# Altium PCB Voltage detect V3.PcbDoc
Units mm, origin at the board's own origin, x right, y up, seen from the top; angles counter-clockwise.
Board outline 97.7 x 87.5 mm, 2 copper layers (Top Layer, Bottom Layer); 87 components, 64 nets, 234 pads, 31 vias.
Unrouted connection lines stored in the file: 5.
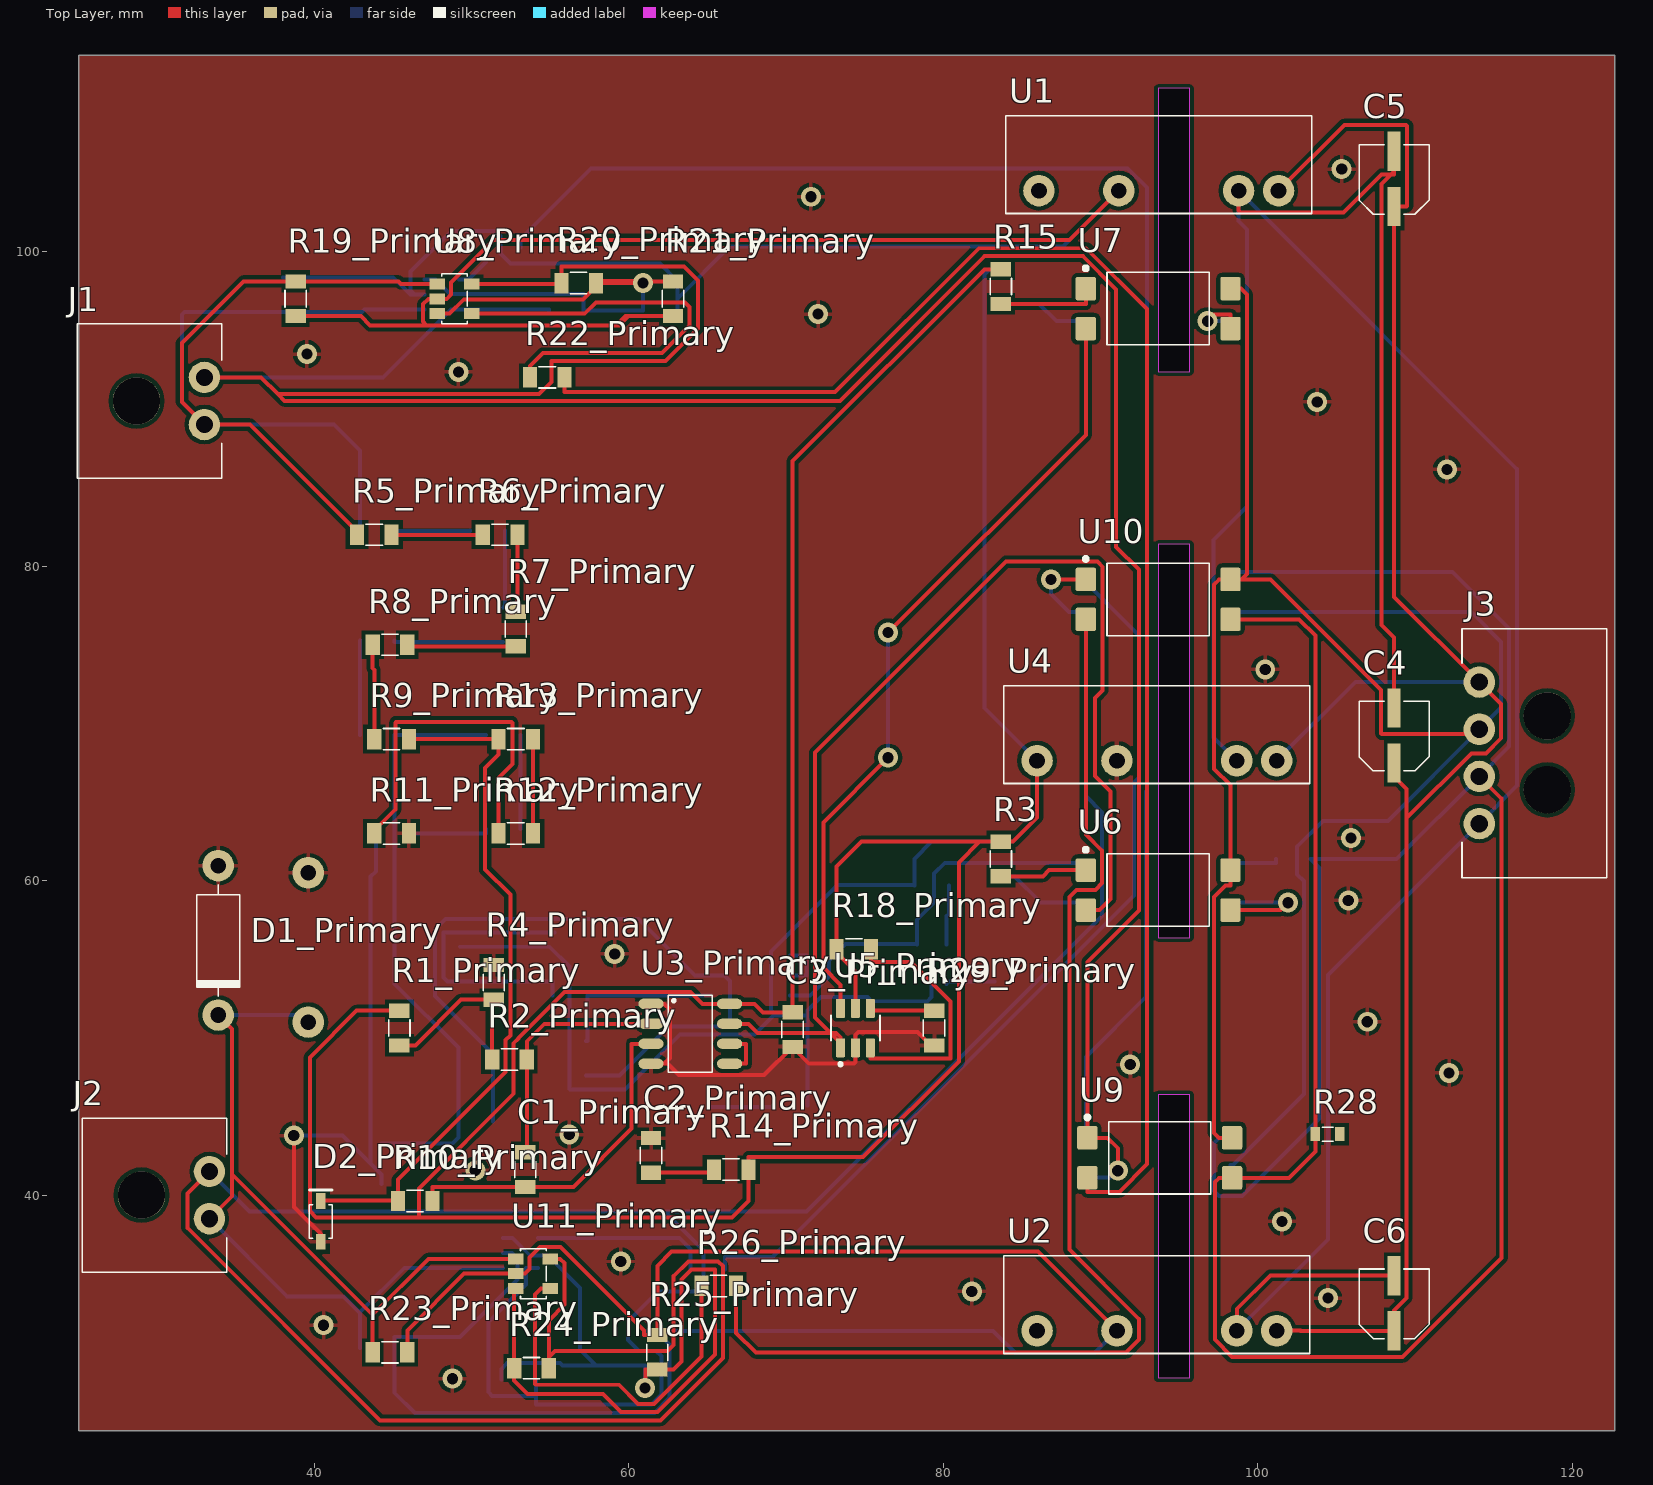
[diagram p0: Top Layer view]
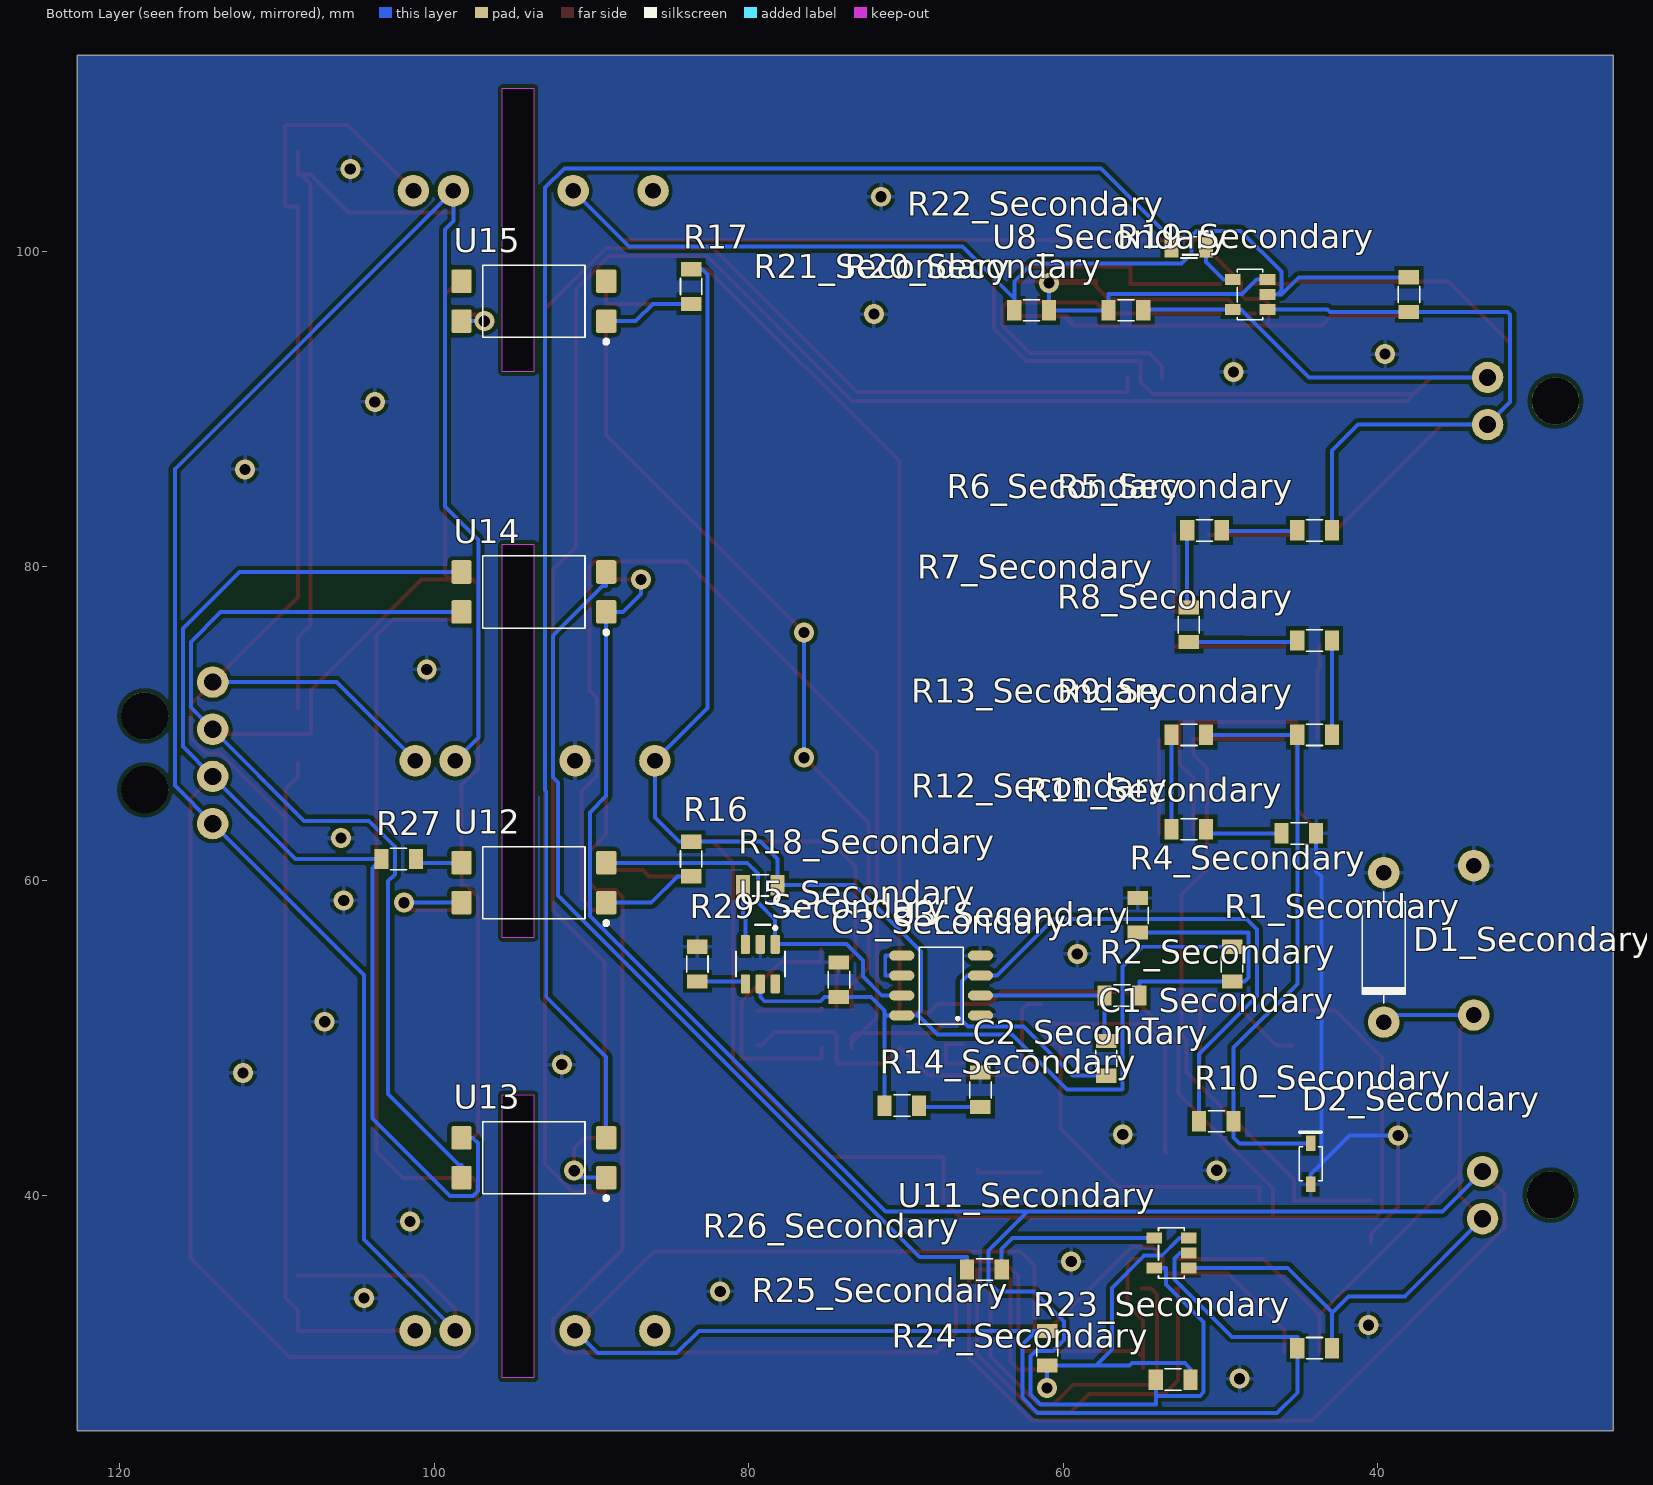
[diagram p1: Bottom Layer view, seen from below]

## Layer stack, top to bottom
Top Solder: solder mask 0.0102, Solder Resist, Dk 3.5
Top Layer: signal copper 0.0356
Dielectric 1: dielectric 0.32, FR-4, Dk 4.8
Bottom Layer: signal copper 0.0356
Bottom Solder: solder mask 0.0102, Solder Resist, Dk 3.5

## Board outline
25,25 25,112.5 122.7,112.5 122.7,25
cut-out: 93.65,28.375 95.65,28.375 95.65,46.375 93.65,46.375
cut-out: 93.65,56.375 95.65,56.375 95.65,81.375 93.65,81.375
cut-out: 93.65,92.375 95.65,92.375 95.65,110.375 93.65,110.375

## Design rules (kind name [scope] priority, off if disabled: settings)
Clearance [All] p1: gap=0.254 ignorepadtopadclearanceinfootprint=FALSE except(0: Arc-Hole Track-Hole SMDPad-Hole THPad-Hole Via-Hole Fill-Hole Poly-Hole Region-Hole Text-Hole)
PolygonConnect [All] p1: connectstyle=Relief reliefconductorwidth=0.254 reliefentries=4 polygonreliefangle="90 Angle" airgapwidth=0.254
RoomDefinition Secondary [InComponentClass('Secondary')] p1: confinementstyle=ConfineIn formatcopy=TRUE lockcomponents=FALSE outline 28,24 103,24 103,115 28,115
RoomDefinition Primary [InComponentClass('Primary')] p2: confinementstyle=ConfineIn formatcopy=TRUE lockcomponents=FALSE outline 28.8,24 103.8,24 103.8,115 28.8,115
RoomDefinition Sheet1 [InComponentClass('Sheet1')] p3: confinementstyle=ConfineIn formatcopy=TRUE lockcomponents=FALSE outline 28.067,0 174.244,0 174.244,20 28.067,20
RoutingVias [All] p1: holewidth=0.711 width=1.27 viastyle="Through Hole" minholewidth=0.711 minwidth=1.27 maxholewidth=0.711 maxwidth=1.27
SolderMaskExpansion [All] p1: expansion=0.102 istentingtop=FALSE
Width [All] p1: maxlimit=0.254 minlimit=0.254 preferedwidth=0.254
30 further rules are at their usual default settings.

## Classes and differential pairs
channel class "Voltage detectV2": Primary Secondary
component class Sheet1: C4 C5 C6 J1 J2 J3 R3 R15 R16 R17 R27 R28 U1 U2 U4 U6 U7 U9 U10 U12 U13 U14 U15
component class Secondary: C1_Secondary C2_Secondary C3_Secondary D1_Secondary D2_Secondary R1_Secondary R2_Secondary R4_Secondary R5_Secondary R6_Secondary R7_Secondary R8_Secondary R9_Secondary R10_Secondary R11_Secondary R12_Secondary R13_Secondary R14_Secondary R18_Secondary R19_Secondary R20_Secondary R21_Secondary R22_Secondary R23_Secondary R24_Secondary R25_Secondary R26_Secondary R29_Secondary U3_Secondary U5_Secondary U8_Secondary U11_Secondary
component class Primary: C1_Primary C2_Primary C3_Primary D1_Primary D2_Primary R1_Primary R2_Primary R4_Primary R5_Primary R6_Primary R7_Primary R8_Primary R9_Primary R10_Primary R11_Primary R12_Primary R13_Primary R14_Primary R18_Primary R19_Primary R20_Primary R21_Primary R22_Primary R23_Primary R24_Primary R25_Primary R26_Primary R29_Primary U3_Primary U5_Primary U8_Primary U11_Primary

## Components (designator, comment, footprint, x,y, rotation, side; value= is the part's Value field where it differs from the comment)
C1_Primary "10nF" "0805 Capicator" 53.4,41.625 r90 top (schematic designator C1)
C1_Secondary "10nF" "0805 Capicator" 57.25,48.694 r90 bottom (schematic designator C1)
C2_Primary "0.1uF" "0805 Capicator" 61.4,42.525 r90 top (schematic designator C2)
C2_Secondary "0.1uF" "0805 Capicator" 65.25,46.694 r90 bottom (schematic designator C2)
C3_Primary "0.1uF" "0805 Capicator" 70.4,50.525 r270 top (schematic designator C3)
C3_Secondary "0.1uF" "0805 Capicator" 74.25,53.694 r90 bottom (schematic designator C3)
C4 "4.7uF" "Bar Cap 4x5.4" 108.65,70.977 r0 top
C5 "4.7uF" "Bar Cap 4x5.4" 108.65,106.375 r0 top
C6 "4.7uF" "Bar Cap 4x5.4" 108.65,34.875 r0 top
D1_Primary "Diode" DO-41 33.875,60.95 r270 top (schematic designator D1)
D1_Secondary "Diode" DO-41 39.6,60.5 r270 bottom (schematic designator D1)
D2_Primary "Zener 12V" sod-323 40.4,37.025 r90 top (schematic designator D2)
D2_Secondary "Zener 12V" sod-323 44.25,40.694 r90 bottom (schematic designator D2)
J1 "Conn2x1" "MolexMicroFit 2x1" 33,92 r270 top
J2 "Conn2x1" "MolexMicroFit 2x1" 33.32,41.5 r270 top
J3 "Conn4x1" "MolexMicroFit 4x1" 114.075,72.625 r90 top
R1_Primary "75k" "0805 Resistor" 45.4,50.625 r270 top (schematic designator R1)
R1_Secondary "75k" "0805 Resistor" 49.25,54.694 r270 bottom (schematic designator R1)
R2_Primary "100R" "0805 Resistor" 52.4,48.625 r0 top (schematic designator R2)
R2_Secondary "100R" "0805 Resistor" 56.25,52.694 r0 bottom (schematic designator R2)
R3 "100R" "0805 Resistor" 83.65,61.375 r90 top
R4_Primary "200k" "0805 Resistor" 51.4,53.525 r270 top (schematic designator R4)
R4_Secondary "200k" "0805 Resistor" 55.25,57.794 r270 bottom (schematic designator R4)
R5_Primary "200k" "0805 Resistor" 43.8,82 r0 top (schematic designator R5)
R5_Secondary "200k" "0805 Resistor" 44,82.269 r0 bottom (schematic designator R5)
R6_Primary "200k" "0805 Resistor" 51.8,82 r0 top (schematic designator R6)
R6_Secondary "200k" "0805 Resistor" 51,82.269 r0 bottom (schematic designator R6)
R7_Primary "200k" "0805 Resistor" 52.8,76 r270 top (schematic designator R7)
R7_Secondary "200k" "0805 Resistor" 52,76.269 r270 bottom (schematic designator R7)
R8_Primary "200k" "0805 Resistor" 44.8,75 r180 top (schematic designator R8)
R8_Secondary "200k" "0805 Resistor" 44,75.269 r180 bottom (schematic designator R8)
R9_Primary "200k" "0805 Resistor" 44.9,69 r0 top (schematic designator R9)
R9_Secondary "200k" "0805 Resistor" 44,69.269 r0 bottom (schematic designator R9)
R10_Primary "100R" "0805 Resistor" 46.4,39.625 r0 top (schematic designator R10)
R10_Secondary "100R" "0805 Resistor" 50.25,44.694 r0 bottom (schematic designator R10)
R11_Primary "2.4k" "0805 Resistor" 44.9,63 r180 top (schematic designator R11)
R11_Secondary "2.4k" "0805 Resistor" 45,63 r0 bottom (schematic designator R11)
R12_Primary "24k" "0805 Resistor" 52.8,63 r180 top (schematic designator R12)
R12_Secondary "24k" "0805 Resistor" 52,63.269 r180 bottom (schematic designator R12)
R13_Primary "24k" "0805 Resistor" 52.8,69 r180 top (schematic designator R13)
R13_Secondary "24k" "0805 Resistor" 52,69.269 r180 bottom (schematic designator R13)
R14_Primary "1k" "0805 Resistor" 66.5,41.625 r180 top (schematic designator R14)
R14_Secondary "1k" "0805 Resistor" 70.25,45.694 r180 bottom (schematic designator R14)
R15 "100R" "0805 Resistor" 83.65,97.775 r90 top
R16 "100R" "0805 Resistor" 83.65,61.375 r90 bottom
R17 "100R" "0805 Resistor" 83.65,97.775 r90 bottom
R18_Primary "1k" "0805 Resistor" 74.3,55.625 r180 top (schematic designator R18)
R18_Secondary "1k" "0805 Resistor" 79.25,59.694 r180 bottom (schematic designator R18)
R19_Primary "1k" "0805 Resistor" 38.8,97 r90 top (schematic designator R19)
R19_Secondary "1k" "0805 Resistor" 38,97.269 r270 bottom (schematic designator R19)
R20_Primary "1k" "0805 Resistor" 56.8,98 r180 top (schematic designator R20)
R20_Secondary "1k" "0805 Resistor" 56,96.269 r180 bottom (schematic designator R20)
R21_Primary "1k" "0805 Resistor" 62.8,97 r90 top (schematic designator R21)
R21_Secondary "1k" "0805 Resistor" 62,96.269 r180 bottom (schematic designator R21)
R22_Primary "1k" "0805 Resistor" 54.8,92 r0 top (schematic designator R22)
R22_Secondary "1k" "0805 Resistor" 52,100.269 r0 bottom (schematic designator R22)
R23_Primary "1k" "0805 Resistor" 44.8,30 r180 top (schematic designator R23)
R23_Secondary "1k" "0805 Resistor" 44,30.269 r180 bottom (schematic designator R23)
R24_Primary "1k" "0805 Resistor" 53.8,29 r0 top (schematic designator R24)
R24_Secondary "1k" "0805 Resistor" 53,28.269 r0 bottom (schematic designator R24)
R25_Primary "1k" "0805 Resistor" 61.8,30 r270 top (schematic designator R25)
R25_Secondary "1k" "0805 Resistor" 61,30.269 r270 bottom (schematic designator R25)
R26_Primary "1k" "0805 Resistor" 65.7,34.224 r0 top (schematic designator R26)
R26_Secondary "1k" "0805 Resistor" 65,35.269 r0 bottom (schematic designator R26)
R27 "1k" "0805 Resistor" 102.25,61.375 r0 bottom
R28 "2.4k" "0603 Resistor" 104.43,43.875 r180 top
R29_Primary "1k" "0805 Resistor" 79.4,50.625 r90 top (schematic designator R29)
R29_Secondary "1k" "0805 Resistor" 83.25,54.694 r270 bottom (schematic designator R29)
U1 "DC/DC" "SIP7 TMV" 83.92,102.645 r270 top
U2 "DC/DC" "SIP7 TMV" 83.8,30.145 r270 top
U3_Primary "Comp" SOIC-8 61.4,52.165 r0 top (schematic designator U3)
U3_Secondary "Comp" SOIC-8 65.25,51.424 r0 bottom (schematic designator U3)
U4 "DC/DC" "SIP7 TMV" 83.8,66.395 r270 top
U5_Primary "Inv" SOT236 74.4,50.625 r90 top (schematic designator U5)
U5_Secondary "Inv" SOT236 79.25,54.694 r270 bottom (schematic designator U5)
U6 "Opt" FAIR-MDIP-4_V 93.65,59.395 r0 top
U7 "Opt" FAIR-MDIP-4_V 93.65,96.375 r0 top
U8_Primary "Comparator [LMV]" SOT-23-5 47.8,97 r270 top (schematic designator U8)
U8_Secondary "Comparator [LMV]" SOT-23-5 47,97.269 r90 bottom (schematic designator U8)
U9 "Opt" FAIR-MDIP-4_V 93.75,42.37 r0 top
U10 "Opt" FAIR-MDIP-4_V 93.65,77.885 r0 top
U11_Primary "Comparator [LMV]" SOT-23-5 52.8,35 r270 top (schematic designator U11)
U11_Secondary "Comparator [LMV]" SOT-23-5 52,36.319 r90 bottom (schematic designator U11)
U12 "Opt" FAIR-MDIP-4_V 93.65,59.865 r0 bottom
U13 "Opt" FAIR-MDIP-4_V 93.65,42.375 r0 bottom
U14 "Opt" FAIR-MDIP-4_V 93.65,78.355 r0 bottom
U15 "Opt" FAIR-MDIP-4_V 93.65,96.845 r0 bottom

## Footprints (in the part's own frame and the unit in brackets; to place one, negate y for a bottom-side part, rotate by r counter-clockwise, add the part's x,y. Pads: shape width x height; smd on the part's side, far side on the other; paste and mask are expansions set on the pad)
"0603 Resistor" [mm]
  rect 0.6x0.9 smd: 1(-0.78,0) 2(0.78,0)
  silkscreen extent -0.35,-0.45 0.35,0.45, body extent -0.85,-0.45 0.85,0.45, height 0.55
"0805 Capicator" [mm]
  rect 0.9x1.3 smd: 1(-1.1,0) 2(1.1,0)
  silkscreen extent -0.53,-0.67 0.53,0.68, body extent -1.05,-0.67 1.05,0.68, height 0.75
"0805 Resistor" [mm]
  rect 0.9x1.3 smd: 1(-1.1,0) 2(1.1,0)
  silkscreen extent -0.53,-0.68 0.52,0.67, body extent -1.05,-0.67 1.05,0.68, height 0.6
"Bar Cap 4x5.4" [mm]
  rect 0.8x2.5 smd: 1(0,0) 2(0,-3.5)
  silkscreen extent -2.2,-4 2.25,0.43, body extent -2.15,-4.3 2.15,0.7, height 5.4
DO-41 [mm]
  round 2 hole 1: 1(0,0) 2(9.5,0)
  silkscreen extent 1.2,-1.37 8.3,1.38, body extent -0.39,-1.35 9.99,1.35, height 2.83
FAIR-MDIP-4_V [mm]
  rrect20% 1.3x1.5 smd: 1(-4.6,1.27) 2(-4.6,-1.27) 3(4.6,-1.27) 4(4.6,1.27)
  silkscreen extent -4.72,-2.3 3.25,2.69, body extent -5.08,-2.3 5.08,2.3, height 3.85
"MolexMicroFit 2x1" [mm]
  round 2 hole 1.1: 1(3,0) 2(0,0)
  round 3 hole 3: A(1.5,-4.32)
  silkscreen extent -3.4,-8.1 6.4,1.1, body extent -3.33,-8.9 6.33,1, height 5.64
"MolexMicroFit 4x1" [mm]
  round 2 hole 1.1: 1(0,0) 2(-3,0) 3(-6,0) 4(-9,0)
  round 3 hole 3: A(-6.85,-4.32) A(-2.15,-4.32)
  silkscreen extent -12.45,-8.1 3.4,1.1, body extent -12.35,-8.87 3.3,1.03, height 5.64
"SIP7 TMV" [mm]
  round 2 hole 1: 1(-1.23,17.39) 2(-1.23,14.85) 4(-1.23,7.23) 6(-1.23,2.15)
  silkscreen extent -6.01,0.04 0.22,19.49, body extent -5.93,0.12 0.16,19.42, height 0.25
sod-323 [mm]
  rect 1x0.6 smd: 1(0,0) 2(2.6,0)
  silkscreen extent 0.23,-0.72 3.3,0.72, body extent 0.03,-0.68 2.63,0.67, height 1.1
SOIC-8 [mm]
  oval 1.6x0.65 smd: 1(0,0) 2(0,-1.27) 3(0,-2.54) 4(0,-3.81) 5(5,-3.81) 6(5,-2.54) 7(5,-1.27) 8(5,0)
  silkscreen extent 1.1,-4.35 3.9,0.55, body extent -0.36,-4.35 5.41,0.55, height 1.45
SOT236 [mm]
  rrect25% 1.21x0.58 smd: 1(-1.255,0.95) 2(-1.255,0) 3(-1.255,-0.95) 4(1.255,-0.95) 5(1.255,0) 6(1.255,0.95)
  silkscreen extent -2.4,-1.56 0.8,1.56, body extent -1.4,-1.45 1.4,1.45, height 1.45
SOT-23-5 [mm]
  rect 0.7x1 smd mask+0.045: 1(-0.95,0) 2(0,0) 3(0.95,0) 4(0.95,2.2) 5(-0.95,2.2)
  silkscreen extent -1.6,0.3 1.6,1.93, body extent -1.5,-0.15 1.5,2.35, height 1.1

## Part data
C1_Primary C1_Secondary: library part "Cap 10nF (0805)", "0805 X7R 10nF 100V 10%", Manufacturer="Murata Manufacturing", Part Number=GRM21BR72A103KA01L, ComponentLink1Description=Chip&Dip, ComponentLink1URL=https://www.chipdip.ru/product/grm21br72a103ka01l, Type=Capacitor
C2_Primary C2_Secondary C3_Primary C3_Secondary: library part "Cap 0.1uF (0805)", "0.1uF X7R 25V 10% 0805", Manufacturer="Murata Manufacturing", Part Number=GRM21BR71E104KA01L, ComponentLink1Description=Chip&Dip, ComponentLink1URL=https://www.chipdip.ru/product/grm21br71e104ka01l, Type=Capacitor
C4 C5 C6: library part "Cap Pol 4.7uF", "ECAP SMD,  35V, 105°C", Manufacturer=Epcos, Part Number=B41121A7475M000, ComponentLink1Description=Chip&Dip, ComponentLink1URL=https://www.chipdip.ru/product/b41121a7475m000, Type=Capacitor
D1_Primary D1_Secondary: library part "Diode HV [EM5]", "Highg voltage diode - 2000V", Manufacturer=China, Part Number=EM518, ComponentLink1Description=ChipDip, ComponentLink1URL=https://www.chipdip.ru/product/em518, ComponentLink2Description=Datasheet, ComponentLink2URL=https://static.chipdip.ru/lib/004/DOC001004767.pdf, Type=Diode
D2_Primary D2_Secondary: library part "Zener Diode 12V", "300mW", Manufacturer="NXP Semiconductor", Part Number=BZX384-C12,115, ComponentLink1Description=Chip&Dip, ComponentLink1URL=https://www.chipdip.ru/product/bzx384-c12.115, ComponentLink2Description=DataSheet, ComponentLink2URL=https://static.chipdip.ru/lib/583/DOC001583013.pdf, Type=Diode
J1 J2: library part "Conn 2 [MicroFit]", "Micro-Fit 3.0 Right-Angle Header, 3.00mm Pitch, Single Row, 2 Circuits, with Snap-in Plastic Peg PCB Lock, Tin, Glow-Wire Capable, Black", Manufacturer=Molex, Part Number=436500200, ComponentLink1Description=Molex, ComponentLink1URL=https://www.molex.com/molex/products/part-detail/pcb_headers/0436500200, Type=Connector
J3: library part "Conn 4 [MicroFit]", "Micro-Fit 3.0 Right-Angle Header, 3.00mm Pitch, Single Row, 4 Circuits, with Snap-in Plastic Peg PCB Lock, Tin, Glow-Wire Capable, Black", Manufacturer=Molex, Part Number=436500400, ComponentLink1Description=Molex, ComponentLink1URL=https://www.molex.com/molex/products/part-detail/pcb_headers/0436500400, Type=Connector
R1_Primary R1_Secondary: library part "Res 75k (0805)", "0.125W 0805 75k, 1%", Manufacturer=Taiwan, Part Number=RC0805FR-0775KL, ComponentLink1Description=Chip&Dip, ComponentLink1URL=https://www.chipdip.ru/product0/9000079535, Type=Resistor
R2_Primary R2_Secondary R3 R10_Primary R10_Secondary R15 R16 R17: library part "Res 100R (0805)", "0.125W 0805 100R, 1%", Manufacturer=Taiwan, Part Number=RC0805FR-07100RL, ComponentLink1Description=Chip&Dip, ComponentLink1URL=https://www.chipdip.ru/product0/9000079462, Type=Resistor
R4_Primary R4_Secondary R5_Primary R5_Secondary R6_Primary R6_Secondary R7_Primary R7_Secondary R8_Primary R8_Secondary R9_Primary R9_Secondary: library part "Res 200k (0805)", "0.125W 0805 200k, 1%", Manufacturer=Taiwan, Part Number=RC0805FK-07200KL, ComponentLink1Description=Chip&Dip, ComponentLink1URL=https://www.chipdip.ru/product0/914213016, Type=Resistor
R11_Primary R11_Secondary: library part "Res 2.4k (0805)", "0.125W 0805 2.4k, 1%", Manufacturer=Taiwan, Part Number=RC0805FR-072K4L, ComponentLink1Description=Chip&Dip, ComponentLink1URL=https://www.chipdip.ru/product0/9000079495, Type=Resistor
R12_Primary R12_Secondary R13_Primary R13_Secondary: library part "Res 24k (0805)", "0.125W 0805 24k, 1%", Manufacturer=Taiwan, Part Number=RC0805FR-0724KL, ComponentLink1Description=Chip&Dip, ComponentLink1URL=https://www.chipdip.ru/product0/9000079523, Type=Resistor
R14_Primary R14_Secondary R18_Primary R18_Secondary R19_Primary R19_Secondary R20_Primary R20_Secondary R21_Primary R21_Secondary R22_Primary R22_Secondary R23_Primary R23_Secondary R24_Primary R24_Secondary R25_Primary R25_Secondary R26_Primary R26_Secondary R27 R29_Primary R29_Secondary: library part "Res 1k (0805)", "0.125W 0805 1k, 1%", Manufacturer=Taiwan, Part Number=RC0805FR-071KL, ComponentLink1Description=Chip&Dip, ComponentLink1URL=https://www.chipdip.ru/product0/9000079486, Type=Resistor
R28: library part "Res 2.4k (0603)", "0.1W 0603 2.4k, 1%", Manufacturer=Taiwan, Part Number=RC0603FR-072K4L, ComponentLink1Description=Chip&Dip, ComponentLink1URL=https://www.chipdip.ru/product0/9000079721, Type=Resistor
U1 U2 U4: library part "DC/DC Isolated [TMH]", "The TMV series are ultra miniature, isolated 1 Watt DC/DC-converters in a Single-in-Line  package  (SIP)", ComponentLink1Description=Chip&Dip, ComponentLink2Description="New link", ComponentLink2URL=https://static.chipdip.ru/lib/005/DOC001005854.pdf
U3_Primary U3_Secondary: library part "Comparator [LM3]", "Differential comparator with strobes", Manufacturer="Texas Instruments", Part Number=LM311DR, ComponentLink1Description=DataSheet, ComponentLink1URL=https://static.chipdip.ru/lib/222/DOC000222396.pdf, ComponentLink2Description=Chip&Dip, ComponentLink2URL=https://www.chipdip.ru/product/lm311d, Type=IC
U5_Primary U5_Secondary: library part "Inventer (SN74)", "Dual inverter, 1.65-5.5V", Manufacturer="Texas Instruments", Part Number=SN74LVC2G04DBVR, ComponentLink1Description=Chip&Dip, ComponentLink1URL=https://www.chipdip.ru/product/sn74lvc2g04dbvr-2, ComponentLink2Description=DataSheet, ComponentLink2URL=https://static.chipdip.ru/lib/021/DOC001021810.pdf, Type=IC
U6 U7 U9 U10 U12 U13 U14 U15: library part "Optocoupler [FOD817B]", "Phototransistor Optocoupler, 4 us Rise, 3 us Fall, 5000 Vrms, -55 to 110 degC, 4-Pin MDIP, RoHS, Tape and Reel", Manufacturer="ON Semiconductor", Part Nomber=FOD817B, ComponentLink1Description=Chip&Dip, ComponentLink1URL=https://www.chipdip.ru/product/fod817b, ComponentLink2Description=DataSheet, ComponentLink2URL=https://static.chipdip.ru/lib/297/DOC000297284.pdf
U8_Primary U8_Secondary U11_Primary U11_Secondary: "Differential comparator with strobes", Manufacturer="Texas Instruments", Part Number=LMV331M5/NOPB, ComponentLink1Description=DataSheet, ComponentLink1URL=https://static.chipdip.ru/lib/291/DOC000291302.pdf, ComponentLink2Description=Chip&Dip, ComponentLink2URL=https://www.chipdip.ru/product/lmv331m5-nopb, Type=IC

## Via types
v1: diameter 1.27, hole 0.711, Top Layer to Bottom Layer, 31 vias

## Nets (pads, with @x,y where several pads share a name; then routed paths per layer and width w, separated by ;. In a path a pad name is that pad's centre, name@x,y a point inside that pad or via, vN(x,y) a via of type N, cw(c..) or ccw(c..) an arc to the next point about the centre after c; other vN are vias at no path point)
5V: C3_Primary.1 C3_Secondary.1 R1_Primary.1 R1_Secondary.1 R3.2 R14_Primary.1 R14_Secondary.1 R15.2 R16.2 R17.2 R18_Primary.2 R18_Secondary.2 U3_Primary.8 U3_Secondary.8 U4.6 U5_Primary.5 U5_Secondary.5 | length 302.6
  Top Layer w0.254: R1_Primary.1 42.672,51.725 39.7,48.753 39.7,38.98 40.094,38.586 46.634,38.586 ; U5_Primary.5 74.4,54.223 73.2,55.423 R18_Primary.2 73.2,60.89 74.785,62.475 82.296,62.475 ; R15.2 82.601,98.875 70.409,86.683 70.409,51.625 C3_Primary.1 68.529,51.625 67.989,52.165 U3_Primary.8 64.668,52.165 63.925,52.908 55.895,52.908 52.984,49.998 52.984,49.972 52.669,49.657 52.669,46.446 46.634,40.411 46.634,38.586 ; U4.6 85.95,64.008 84.417,62.475 R3.2 82.296,62.475 ; 46.634,38.586 66.562,38.586 67.6,39.624 R14_Primary.1 67.6,42.418 74.89,42.418 80.975,48.503 80.975,61.154 82.296,62.475
  Bottom Layer w0.254: R1_Secondary.1 54.95,55.794 56.21,54.534 56.21,46.761 56.261,46.711 59.741,46.711 63.24,50.21 67.982,50.21 69.196,51.424 69.342,51.424 ; R14_Secondary.1 71.35,46.598 71.35,51.424 ; R18_Secondary.2 R18_Secondary.2@78.15,59.715 ; U5_Secondary.5 79.25,52.584 78.994,52.328 75.434,52.328 75.168,52.594 C3_Secondary.1 72.204,52.594 71.35,51.74 71.35,51.424 ; R17.2 82.924,98.875 82.601,98.552 82.601,70.974 U4.6 85.95,64.008 84.417,62.475 R16.2 79.248,62.475 78.15,61.377 R18_Secondary.2@78.15,59.715 ; 69.342,51.424 69.037,51.729 69.037,55.504 73.249,59.715 R18_Secondary.2@78.15,59.715 ; 69.342,51.424 U3_Secondary.8 71.35,51.424
5V_1: U2.6
5V_2: U1.6
"24V IN": C4.2 C5.2 C6.2 J3.1 U1.1 U2.1 U4.1 | length 150.3
  Top Layer w0.254: U2.1 102.712,31.375 102.718,31.369 108.65,31.369 C6.2 108.65,32.664 109.442,33.456 ; U1.1 105.487,108.052 109.423,108.052 109.474,108.001 109.474,102.9 109.449,102.875 C5.2 108.65,78.05 J3.1 115.468,71.232 115.468,69.054 114.512,68.097 113.572,68.097 109.449,63.974 ; C4.2 108.65,66.624 109.449,65.826 109.449,63.974 ; 109.442,33.456 109.449,33.463 109.449,63.974 ; 109.442,33.456 109.442,63.967 109.449,63.974
  Bottom Layer w0.254: U4.1 106.19,72.625 J3.1
Con1_1: J1.2 R20_Primary.2 R20_Secondary.2 U8_Primary.5 U8_Secondary.5 U9.1 U13.1 | length 196.9
  Top Layer w0.254: J1.2 36.6,92 37.668,90.932 ; U8_Primary.5 55.7,97.95 R20_Primary.2 55.7,99.06 63.491,99.06 64.389,98.162 64.389,95.113 62.307,93.031 55.067,93.031 55.067,91.71 54.289,90.932 37.668,90.932 ; v1(91.084,41.554) 91.084,42.98 90.424,43.64 U9.1 89.15,54.839 92.42,58.108 92.42,79.792 90.983,81.229 90.983,97.587 88.864,99.706 82.601,99.706 73.404,90.509 38.091,90.509 37.668,90.932
  Bottom Layer w0.254: J1.2 44.35,92 48.669,96.319 U8_Secondary.5 54.9,96.319 R20_Secondary.2 ; U13.1 90.635,41.105 v1(91.084,41.554)
Con1_2: J1.1 R5_Primary.1 R5_Secondary.1 R19_Primary.2 R19_Secondary.2 U8_Primary.1 U8_Secondary.1 | length 75.2
  Top Layer w0.254: R5_Primary.1 42.7,82.194 35.894,89 J1.1 31.572,90.428 31.572,94.188 35.484,98.1 R19_Primary.2 45.349,98.1 45.499,97.95 U8_Primary.1
  Bottom Layer w0.254: R5_Secondary.1 42.9,87.351 41.251,89 J1.1 31.572,90.428 31.572,96.012 31.729,96.169 R19_Secondary.2 43.03,96.169 43.18,96.319 U8_Secondary.1
Con2_1: D1_Primary.2 D1_Secondary.2 J2.1 R23_Primary.2 R23_Secondary.2 U11_Primary.1 U11_Secondary.1 | length 70
  Top Layer w0.254: J2.1 34.747,39.927 34.747,41.326 ; D1_Primary.2 34.747,50.578 34.747,41.326 ; R23_Primary.2 43.7,32.373 43.681,32.392 ; U11_Primary.1 47.24,35.95 43.681,32.392 ; 34.747,41.326 43.681,32.392
  Bottom Layer w0.254: J2.1 38.267,33.553 41.859,33.553 42.875,32.537 ; D1_Primary.2 39.15,51.45 D1_Secondary.2 ; R23_Secondary.2 42.9,32.512 42.875,32.537 ; U11_Secondary.1 45.707,35.369 42.875,32.537
Con2_2: J2.2 R24_Primary.2 R24_Secondary.2 U10.1 U11_Primary.5 U11_Secondary.5 U14.1 | length 206.4
  Top Layer w0.254: J2.2 31.928,40.108 31.928,37.923 44.172,25.679 62,25.679 65.964,29.643 65.964,35.49 65.665,35.789 63.779,35.789 62.831,34.84 62.831,30.471 62.459,30.099 55.281,30.099 54.9,29.718 ; R24_Primary.2 54.9,29.718 ; U11_Primary.5 55.626,35.95 55.905,35.671 55.905,33.045 54.9,32.04 54.9,29.718 ; v1(86.843,79.155) U10.1
  Bottom Layer w0.254: J2.2 35.856,38.964 62.255,38.964 ; R24_Secondary.2 54.1,27.252 ; U11_Secondary.5 53.442,35.369 53.442,34.311 51.054,31.924 51.054,27.468 51.288,27.234 54.082,27.234 54.1,27.252 ; v1(86.843,79.155) 86.843,78.232 87.99,77.085 U14.1 89.05,65.382 90.094,64.338 90.094,57.764 71.294,38.964 62.255,38.964 ; 54.1,27.252 54.1,26.695 61.429,26.695 62.052,27.319 62.052,29.769 61.722,30.099 60.63,30.099 59.944,30.785 59.944,31.961 61.841,33.858 64.142,33.858 64.745,34.46 64.745,36.474 62.255,38.964
"DC/DC GND": C4.1 C5.1 C6.1 J3.4 U1.2 U2.2 U4.2 | length 185.9
  Top Layer w0.254: U2.2 98.65,32.762 100.787,34.9 108.65,34.9 C6.1 ; U1.2 98.77,102.616 98.897,102.489 105.435,102.489 107.848,104.902 108.447,104.902 ; C4.1 108.65,75.449 107.848,76.251 107.848,104.304 108.447,104.902 ; C5.1 108.65,105.105 ; 108.447,104.902 108.65,105.105 ; 108.447,104.902 108.65,104.902 108.65,105.105
  Bottom Layer w0.254: U2.2 104.449,37.174 104.449,53.999 J3.4 116.484,66.034 116.484,86.161 U1.2 98.77,101.941 99.314,101.397 99.314,83.795 97.18,81.661 97.18,69.095 U4.2
GND: C2_Primary.2 C2_Secondary.2 C3_Primary.2 C3_Secondary.2 D1_Primary.1 D1_Secondary.1 D2_Primary.1 D2_Secondary.1 R4_Primary.1 R4_Secondary.1 R11_Primary.1 R11_Secondary.1 R29_Primary.1 R29_Secondary.1 U3_Primary.1 U3_Primary.4 U3_Secondary.1 U3_Secondary.4 U4.4 U5_Primary.2 U5_Secondary.2 | length 62.4
  Top Layer w0.254: v1(38.684,43.79) 38.684,39.257 40.4,37.541 D2_Primary.1 ; U3_Primary.4 62.23,48.355 ; U3_Primary.1 62.237,52.165 62.596,51.806 62.596,48.721 62.23,48.355 ; C3_Primary.2 C3_Primary.2@70.383,49.425 ; R29_Primary.1 79.197,49.525 78.354,50.368 74.6,50.368 74.4,50.168 U5_Primary.2 74.4,48.467 74.31,48.377 71.432,48.377 C3_Primary.2@70.383,49.425 ; 62.23,48.355 62.454,48.355 63.184,47.625 68.583,47.625 C3_Primary.2@70.383,49.425
  Bottom Layer w0.254: v1(38.684,43.79) 41.783,43.79 43.559,42.014 ; R11_Secondary.1 43.9,60.588 43.559,60.247 43.559,42.014 ; D2_Secondary.1 44.25,41.323 43.559,42.014
  other v1: 48.767,28.325 40.575,31.725 104.45,33.45 81.8,33.875 59.481,35.778 101.525,38.325 50.225,41.575 56.2,43.85 112.15,47.775 91.875,48.3 106.95,51.025 59.092,55.343 105.745,58.741 105.91,62.703 100.462,73.435 112.019,86.147 103.764,90.44 49.15,92.35 39.518,93.486 72.025,96.025 71.572,103.489 105.325,105.25
GND_1: R23_Primary.1 R23_Secondary.1 R25_Primary.1 R25_Secondary.1 U2.4 U11_Primary.2 U11_Secondary.2 | length 128
  Top Layer w0.254: R23_Primary.1 45.9,31.394 49.506,35 U11_Primary.2 53.375,35 53.681,35.306 53.681,36.043 54.341,36.703 55.636,36.703 60.96,31.379 60.96,31.1 R25_Primary.1 61.8,35.486 62.716,36.402 86.003,36.402 U2.4
  Bottom Layer w0.254: U11_Secondary.2 52.556,36.319 52.908,35.966 52.908,34.646 49.251,30.988 45.1,30.988 R23_Secondary.1 45.1,27.432 46.395,26.137 61.607,26.137 62.586,27.115 62.586,30.505 61.722,31.369 ; R25_Secondary.1 61.722,31.369 ; U2.4 89.602,29.947 84.582,29.947 83.16,31.369 61.722,31.369
GND_2: R19_Primary.1 R19_Secondary.1 R21_Primary.1 R21_Secondary.1 U1.4 U8_Primary.2 U8_Secondary.2 | length 150.5
  Top Layer w0.254: R19_Primary.1 42.951,95.9 43.544,95.307 47.137,95.307 ; R21_Primary.1 59.959,95.9 ; U1.4 88.011,100.736 51.384,100.736 48.692,98.044 48.692,97.282 48.41,97 U8_Primary.2 47.244,97 46.903,96.659 46.903,95.541 47.137,95.307 ; 47.137,95.307 59.188,95.307 ; 47.137,95.307 47.143,95.301 59.182,95.301 59.188,95.307 ; 59.188,95.307 59.781,95.9 59.959,95.9 ; 59.188,95.307 59.366,95.307 59.959,95.9
  Bottom Layer w0.254: R19_Secondary.1 45.001,98.369 46.101,97.269 46.368,97.269 ; U8_Secondary.2 46.368,97.269 ; R21_Secondary.1 63.1,97.028 ; U1.4 87.605,100.33 66.402,100.33 63.1,97.028 ; 46.368,97.269 46.101,97.536 46.101,98.724 48.698,101.321 51.511,101.321 51.841,100.99 51.841,99.873 52.476,99.238 61.976,99.238 63.1,98.114 63.1,97.028
NetC1_Primary_1: C1_Primary.1 R10_Primary.2 U3_Primary.3 | length 21.7
  Top Layer w0.254: R10_Primary.2 47.5,40.525 C1_Primary.1 56.464,40.525 60.173,44.233 60.173,49.625 U3_Primary.3
NetC1_Primary_2: C1_Primary.2 R2_Primary.2 U3_Primary.2 | length 15.5
  Top Layer w0.254: C1_Primary.2 53.5,42.725 R2_Primary.2 53.5,49.784 54.611,50.895 U3_Primary.2
NetC1_Secondary_1: C1_Secondary.1 R10_Secondary.2 U3_Secondary.3 | length 47.5
  Bottom Layer w0.254: R10_Secondary.2 51.35,48.98 47.676,52.654 47.676,56.902 48.33,57.556 60.604,57.556 64.196,53.964 U3_Secondary.3 66.076,53.964 66.436,53.605 66.436,51.116 66.038,50.718 62.509,50.718 59.385,47.594 C1_Secondary.1
NetC1_Secondary_2: C1_Secondary.2 R2_Secondary.2 U3_Secondary.2 | length 10.9
  Bottom Layer w0.254: C1_Secondary.2 57.353,49.794 57.353,51.156 57.35,51.159 R2_Secondary.2 57.35,52.705 64.099,52.705 64.11,52.694 U3_Secondary.2
NetC2_Primary_1: C2_Primary.1 R14_Primary.2 | length 4.2
  Top Layer w0.254: C2_Primary.1 65.4,41.425 R14_Primary.2
NetC2_Secondary_1: C2_Secondary.1 R14_Secondary.2 | length 4
  Bottom Layer w0.254: C2_Secondary.1 69.15,45.594 R14_Secondary.2
NetD2_Primary_2: D2_Primary.2 R9_Primary.2 R10_Primary.1 R13_Primary.2 | length 44
  Top Layer w0.254: D2_Primary.2 40.4,39.649 R10_Primary.1@45.3,39.649 ; R10_Primary.1 R10_Primary.1@45.3,39.649 ; R9_Primary.2 46,69.012 51.7,69.012 R13_Primary.2 51.7,68.021 50.851,67.172 50.851,60.706 52.451,59.106 52.451,50.164 52.146,49.859 52.146,47.827 45.3,40.981 R10_Primary.1@45.3,39.649
NetD2_Secondary_2: D2_Secondary.2 R9_Secondary.2 R10_Secondary.1 R13_Secondary.2 | length 38.2
  Bottom Layer w0.254: D2_Secondary.2 44.25,43.282 48.768,43.282 49.15,43.664 R10_Secondary.1 49.15,49.377 45.1,53.427 R9_Secondary.2@45.1,69.266 ; R9_Secondary.2 R9_Secondary.2@45.1,69.266 ; R13_Secondary.2 50.9,69.266 R9_Secondary.2@45.1,69.266
NetR1_Primary_2: R1_Primary.2 R2_Primary.1 R4_Primary.2 | length 11
  Top Layer w0.254: R1_Primary.2 46.431,49.525 49.331,52.425 R4_Primary.2@51.283,52.425 ; R2_Primary.1 51.3,48.819 51.283,48.836 R4_Primary.2@51.283,52.425 ; R4_Primary.2 R4_Primary.2@51.283,52.425
NetR1_Secondary_2: R1_Secondary.2 R2_Secondary.1 R4_Secondary.2 | length 17.8
  Bottom Layer w0.254: R2_Secondary.1 55.15,53.594 R1_Secondary.2 48.463,53.594 48.209,53.848 48.209,56.694 R4_Secondary.2
NetR3_1: R3.1 U6.1 | length 5.6
  Top Layer w0.254: R3.1 86.326,60.275 86.716,60.665 U6.1
NetR5_Primary_2: R5_Primary.2 R6_Primary.1 | length 5.8
  Top Layer w0.254: R5_Primary.2 44.9,81.991 50.7,81.991 R6_Primary.1
NetR5_Secondary_2: R5_Secondary.2 R6_Secondary.1 | length 4.8
  Bottom Layer w0.254: R5_Secondary.2 45.1,82.245 49.9,82.245 R6_Secondary.1
NetR6_Primary_2: R6_Primary.2 R7_Primary.1 | length 5
  Top Layer w0.254: R7_Primary.1 52.9,77.1 R6_Primary.2
NetR6_Secondary_2: R6_Secondary.2 R7_Secondary.1 | length 5
  Bottom Layer w0.254: R7_Secondary.1 52.121,77.369 52.121,82.047 52.1,82.067 R6_Secondary.2
NetR7_Primary_2: R7_Primary.2 R8_Primary.1 | length 7
  Top Layer w0.254: R8_Primary.1 45.9,74.9 R7_Primary.2
NetR7_Secondary_2: R7_Secondary.2 R8_Secondary.1 | length 7
  Bottom Layer w0.254: R8_Secondary.1 45.1,75.159 48.438,75.159 48.448,75.169 R7_Secondary.2
NetR8_Primary_2: R8_Primary.2 R9_Primary.1 | length 6
  Top Layer w0.254: R8_Primary.2 43.7,73.506 43.8,73.406 R9_Primary.1
NetR8_Secondary_2: R8_Secondary.2 R9_Secondary.1 | length 6
  Bottom Layer w0.254: R9_Secondary.1 R8_Secondary.2
NetR11_Primary_2: R11_Primary.2 R12_Primary.2 | length 22.5
  Top Layer w0.254: R11_Primary.2 43.8,63.195 45.136,64.531 45.136,70.028 45.187,70.079 52.527,70.079 52.578,70.028 52.578,67.412 51.7,66.534 R12_Primary.2
NetR11_Secondary_2: R11_Secondary.2 R12_Secondary.2 | length 5.1
  Bottom Layer w0.254: R11_Secondary.2 46.1,62.992 50.9,62.992 R12_Secondary.2
NetR12_Primary_1: R12_Primary.1 R13_Primary.1 | length 6
  Top Layer w0.254: R12_Primary.1 R13_Primary.1
NetR12_Secondary_1: R12_Secondary.1 R13_Secondary.1 | length 6
  Bottom Layer w0.254: R12_Secondary.1 R13_Secondary.1
NetR15_1: R15.1 U7.1 | length 6.4
  Top Layer w0.254: R15.1 89.05,96.675 U7.1
NetR16_1: R16.1 U12.1 | length 6.1
  Bottom Layer w0.254: R16.1 84.505,60.275 86.185,58.595 U12.1
NetR17_1: R17.1 U15.1 | length 5.9
  Bottom Layer w0.254: R17.1 86.081,96.675 87.181,95.575 U15.1
NetR18_Primary_1: R18_Primary.1 U5_Primary.3 | length 16.3
  Top Layer w0.254: U5_Primary.3 75.35,48.692 80.442,48.692 80.442,52.324 77.94,54.826 75.4,54.826 R18_Primary.1
NetR18_Secondary_1: R18_Secondary.1 U5_Secondary.3 | length 3.8
  Bottom Layer w0.254: U5_Secondary.3 80.2,57.737 80.35,57.887 R18_Secondary.1
NetR22_Primary_1: R22_Primary.1 U8_Primary.4 | length 27.4
  Top Layer w0.254: U8_Primary.4 57.186,96.05 57.91,96.774 63.574,96.774 63.856,96.492 63.856,95.306 62.089,93.539 54.525,93.539 53.7,92.714 R22_Primary.1
NetR22_Secondary_1: R22_Secondary.1 U8_Secondary.4 | length 3.1
  Bottom Layer w0.254: U8_Secondary.4 49.784,98.219 50.9,99.335 R22_Secondary.1
NetR26_Primary_1: R26_Primary.1 U11_Primary.4 | length 23.6
  Top Layer w0.254: U11_Primary.4 54.395,34.05 54.026,33.68 54.026,27.991 54.077,27.94 59.36,27.94 60.579,26.721 61.577,26.721 64.6,29.743 R26_Primary.1
NetR26_Secondary_1: R26_Secondary.1 U11_Secondary.4 | length 11.3
  Bottom Layer w0.254: U11_Secondary.4 63.207,37.269 63.9,36.576 R26_Secondary.1
NetR27_1: R27.1 U12.3 | length 3.1
  Bottom Layer w0.254: U12.3 101.15,61.135 R27.1
NetR28_1: R28.1 U15.3
NetR29_Primary_2: R29_Primary.2 U5_Primary.4 | length 4.2
  Top Layer w0.254: U5_Primary.4 75.35,51.725 R29_Primary.2
NetR29_Secondary_2: R29_Secondary.2 U5_Secondary.4 | length 3.2
  Bottom Layer w0.254: U5_Secondary.4 80.2,53.594 R29_Secondary.2
NetU3_Primary_5: U3_Primary.5 U3_Primary.6 | length 3.4
  Top Layer w0.254: U3_Primary.5 67.454,48.355 67.454,49.625 U3_Primary.6
NetU3_Secondary_5: U3_Secondary.5 U3_Secondary.6 | length 3.4
  Bottom Layer w0.254: U3_Secondary.6 71.304,53.964 71.304,55.234 U3_Secondary.5
NetU6_3: U6.3 U12.4 | length 7.5
  Top Layer w0.254: U6.3 101.432,58.125 v1(101.905,58.598)
  Bottom Layer w0.254: U12.4 98.25,58.598 v1(101.905,58.598)
NetU7_3: U7.3 U15.4 | length 4
  Top Layer w0.254: v1(96.799,95.575) 97.211,95.987 98.25,95.987 U7.3
  Bottom Layer w0.254: v1(96.799,95.575) U15.4
Opt1_P: U3_Primary.7 U5_Primary.1 U6.2 | length 74.3
  Top Layer w0.254: U3_Primary.7 67.589,50.895 68.167,50.317 72.815,50.317 ; U5_Primary.1 U5_Primary.1@73.45,49.682 ; U6.2 89.916,58.125 90.627,58.836 90.627,65.659 89.637,66.65 89.637,71.603 90.119,72.085 90.119,79.959 89.788,80.29 83.972,80.29 71.831,68.149 71.831,51.301 72.815,50.317 ; 72.815,50.317 U5_Primary.1@73.45,49.682 ; 72.815,50.317 73.171,50.317 73.45,50.038 U5_Primary.1@73.45,49.682
Opt1_S: U3_Secondary.7 U5_Secondary.1 U12.2 | length 24.9
  Bottom Layer w0.254: U3_Secondary.7 71.526,52.694 72.731,53.899 72.731,54.915 73.773,55.956 U5_Secondary.1@78.3,55.956 ; U5_Secondary.1 U5_Secondary.1@78.3,55.956 ; U12.2 80.083,61.135 79.4,60.452 79.4,58.606 78.3,57.506 U5_Secondary.1@78.3,55.956
Opt2_P: U5_Primary.6 U7.2 | length 50.6
  Top Layer w0.254: U5_Primary.6 73.45,53.372 72.354,54.468 72.354,63.693 v1(76.479,67.818) ; v1(76.479,75.771) 89.05,88.341 U7.2
  Bottom Layer w0.254: v1(76.479,67.818) v1(76.479,75.771)
Opt2_S: U5_Secondary.6 U15.2
Opt3_Out_P: R22_Primary.2 U9.2 | length 103.2
  Top Layer w0.254: R22_Primary.2 55.9,91.059 73.094,91.059 82.249,100.214 89.077,100.214 92.939,96.352 92.939,41.965 91.182,40.208 89.15,40.208 U9.2
Opt3_Out_S: R22_Secondary.2 U13.2 | length 104.8
  Bottom Layer w0.254: R22_Secondary.2 53.1,100.813 57.57,105.283 91.716,105.283 92.934,104.065 92.934,65.751 92.862,65.679 92.862,52.603 89.05,48.791 U13.2
Opt4_Out_P: R26_Primary.2 U10.2 | length 79.1
  Top Layer w0.254: R26_Primary.2 66.8,31.244 68.067,29.977 91.597,29.977 92.431,30.811 92.431,32.106 88.001,36.535 88.001,58.944 88.468,59.411 89.662,59.411 90.094,59.842 90.094,61.9 89.05,62.944 U10.2
Opt4_Out_S: R26_Secondary.2 U14.2 | length 58.6
  Bottom Layer w0.254: R26_Secondary.2 66.1,36.068 69.123,36.068 92.1,59.046 92.1,66.243 92.424,66.566 92.424,75.595 89.279,78.74 89.05,78.74 U14.2
REF_1: R24_Primary.1 R24_Secondary.1 R25_Primary.2 R25_Secondary.2 U11_Primary.3 U11_Secondary.3 | length 60.7
  Top Layer w0.254: U11_Primary.3 52.7,34.05 R24_Primary.1 52.7,28.199 53.543,27.356 58.344,27.356 59.493,26.206 61.805,26.206 65.456,29.857 65.456,35.255 63.983,35.255 63.348,34.62 63.348,29.408 62.84,28.9 R25_Primary.2 61.062,28.9 61.062,27.788 v1(61.011,27.737)
  Bottom Layer w0.254: R24_Secondary.1 51.9,28.956 52.257,29.313 55.625,29.313 55.769,29.169 57.912,29.169 ; U11_Secondary.3 52.596,37.269 53.721,36.144 54.839,36.144 56.896,34.087 56.896,30.185 57.912,29.169 ; v1(61.011,27.737) 61.011,29.169 R25_Secondary.2 60.096,29.169 57.912,29.169
REF_2: R20_Primary.1 R20_Secondary.1 R21_Primary.2 R21_Secondary.2 U8_Primary.3 U8_Secondary.3 | length 36.1
  Top Layer w0.254: U8_Primary.3 48.59,96.05 49.492,96.952 57.062,96.952 57.9,97.79 R20_Primary.1 ; v1(60.9,98) R20_Primary.1 ; R21_Primary.2 60.269,98.1 60.249,98.12 57.9,98.12 R20_Primary.1
  Bottom Layer w0.254: U8_Secondary.3 47.704,98.219 48.616,97.307 57.1,97.307 R20_Secondary.1 60.9,96.266 R21_Secondary.2 v1(60.9,98)
Sgn_In: J3.2 U6.4 U7.4 U9.4 U10.4 U13.4 U14.4 | length 141.6
  Top Layer w0.254: U7.4 98.926,97.645 99.289,97.282 99.289,79.502 98.942,79.155 ; U9.4 97.508,43.64 97.202,43.945 97.202,58.947 97.945,59.69 98.25,59.69 U6.4 98.25,66.065 97.206,67.11 97.206,78.825 97.536,79.155 U10.4 98.942,79.155 ; J3.2 113.767,69.317 107.874,69.317 107.823,69.367 107.823,72.136 100.804,79.155 98.942,79.155
  Bottom Layer w0.254: U13.4 98.25,41.91 98.402,41.91 102.927,46.435 102.927,59.963 102.489,60.401 102.489,62.154 104.14,63.805 108.255,63.805 J3.2 115.468,71.018 115.468,75.184 113.567,77.085 U14.4
Sgn_Out: J3.3 R27.2 R28.2 U9.3 U10.3 U13.3 U14.3 | length 180.5
  Top Layer w0.254: U10.3 102.616,76.615 103.65,75.581 R28.2 103.65,42.766 101.984,41.1 U9.3 97.536,41.1 97.257,40.821 97.257,30.808 98.346,29.718 109.203,29.718 115.494,36.009 115.494,65.206 J3.3
  Bottom Layer w0.254: U13.3 97.536,43.645 97.206,43.315 97.206,40.265 97.517,39.954 98.982,39.954 103.911,44.884 103.911,60.805 R27.2@103.35,61.366 ; U14.3 112.374,79.625 115.976,76.022 115.976,68.526 J3.3 108.816,61.366 R27.2@103.35,61.366 ; R27.2 R27.2@103.35,61.366
pads on no net: J1.A J2.A J3.A

## Polygon pours and split planes (outlines as drawn)
GND on Bottom Layer "GND_L02_P002" (solid, remove dead copper, pour order 2): 25,25 25,112.5 122.7,112.5 122.7,25
GND on Top Layer "GND_L01_P003" (solid, remove dead copper, pour order 3): 25,25 25,112.5 122.7,112.5 122.7,25

## Silkscreen, mask and mechanical layers (free items; w line width, h text height)
Mechanical 1:
  the board outline again, w0.254